# Altium PCB Alert_Button.PcbDoc (part 2 of 2)
Units mm, origin at the board's own origin, x right, y up, seen from the top; angles counter-clockwise.
Board outline 28.5 x 30 mm, 6 copper layers (Top Layer, Layer 1, Layer 2, Layer 3, Layer 4, Bottom Layer), stack 1.538 mm thick; 72 components, 33 nets, 251 pads, 212 vias.
Unrouted connection lines stored in the file: 12.
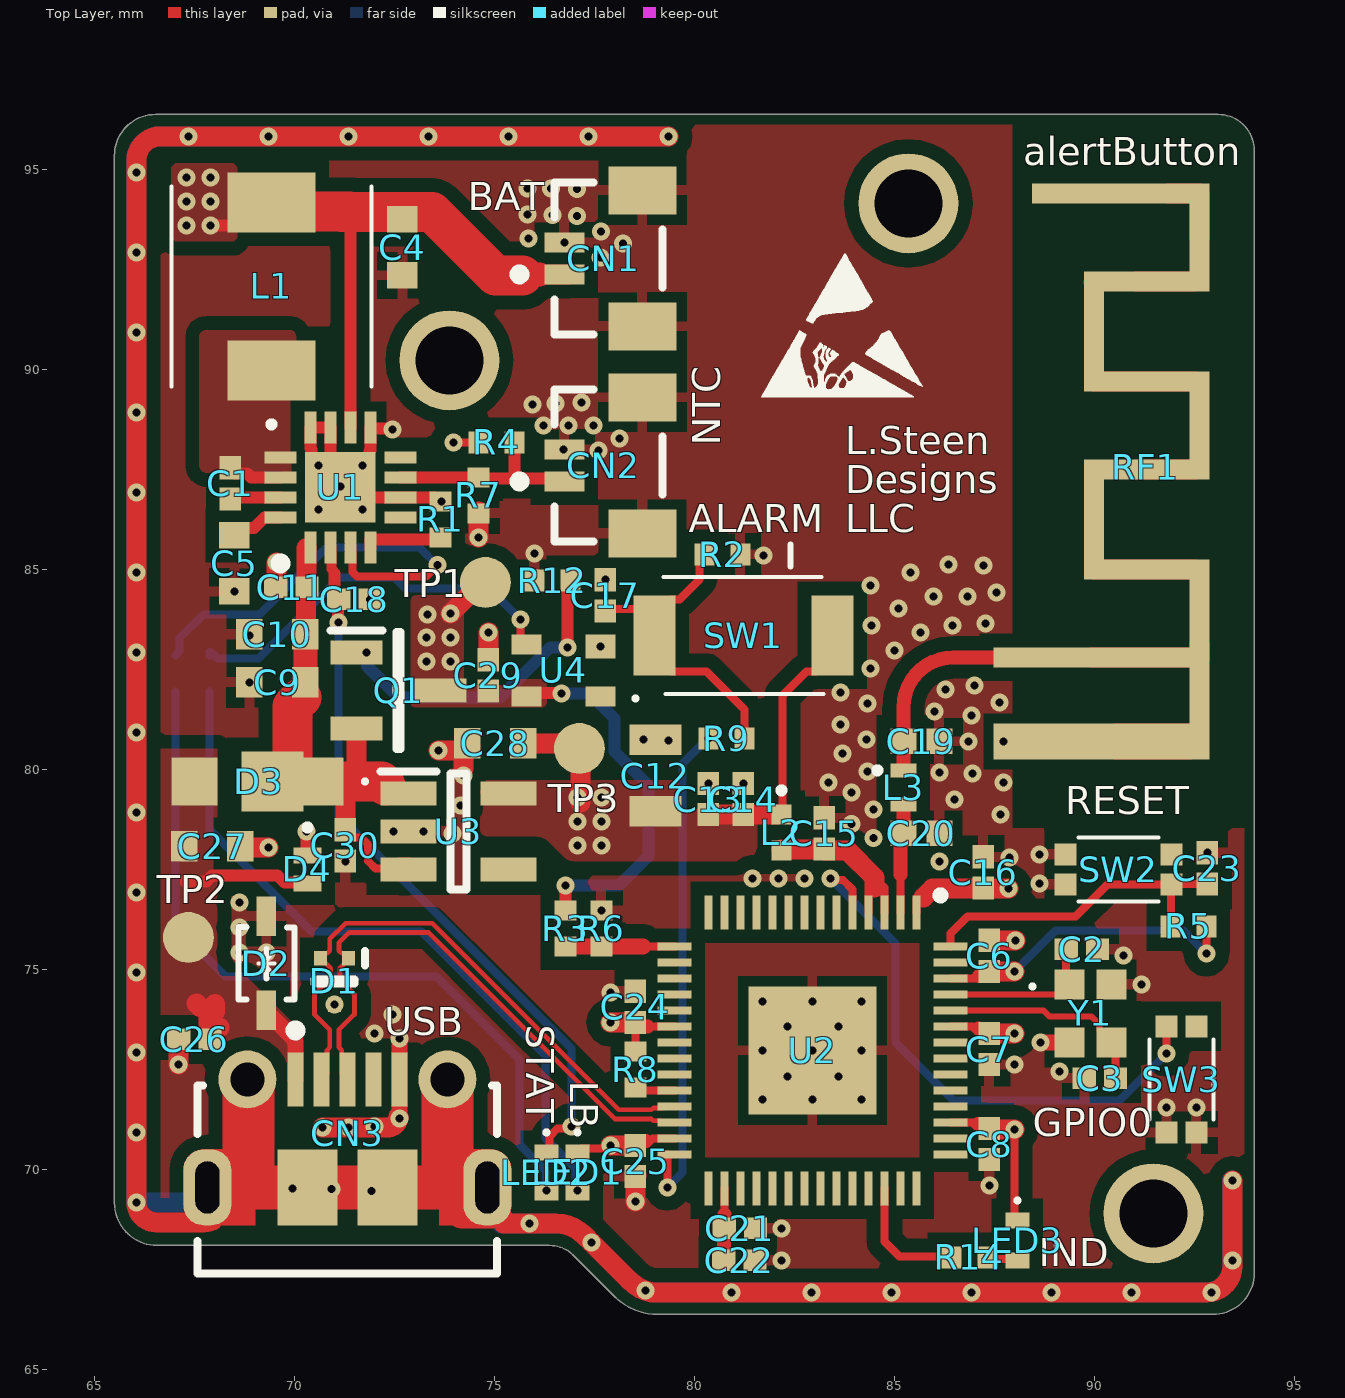
[diagram p0: Top Layer view]

## Dimensions (continued)
65.5,100.075 to 66.3,99.575 on Dimensions
93.095,96.375 to 94.45,78.65 on Dimensions
87.975,107.225 to 94,95.47 on Dimensions
100.1,66.375 to 66.567,68.1 on Dimensions
90.5,104.9 to 87.975,82.275 on Dimensions
65.5,102.925 to 90.5,104.9 on Dimensions
87.475,81.25 to 87.975,82.275 on Dimensions
94,66.375 to 101.675,81.375 on Dimensions
65.5,96.375 to 79.75,98.725 on Dimensions
94,102.825 to 93.7,101.1 on Dimensions
65.5,96.375 to 65.5,96.075 on Dimensions
66.45,66.375 to 62.75,96.375 on Dimensions
65.5,67.4 to 94,64.525 on Dimensions
65.8,67.175 to 65.5,67.4 on Dimensions
66.4,66.675 to 66.45,66.375 on Dimensions

## Text inside footprints (layer, text, board x,y; h text height)
CN3: Mechanical 1 "PCB EDGE" at 64.125,68 h0.3